# Altium PCB Tranceiver PCB - JLCPCB - 2 Layer - 1oz 1.6mm.PcbDoc
Units mm, origin at the board's own origin, x right, y up, seen from the top; angles counter-clockwise.
Board outline 42 x 52 mm, 2 copper layers (Layer 1, Layer 2), stack 1.62 mm thick; 82 components, 46 nets, 247 pads, 91 vias.
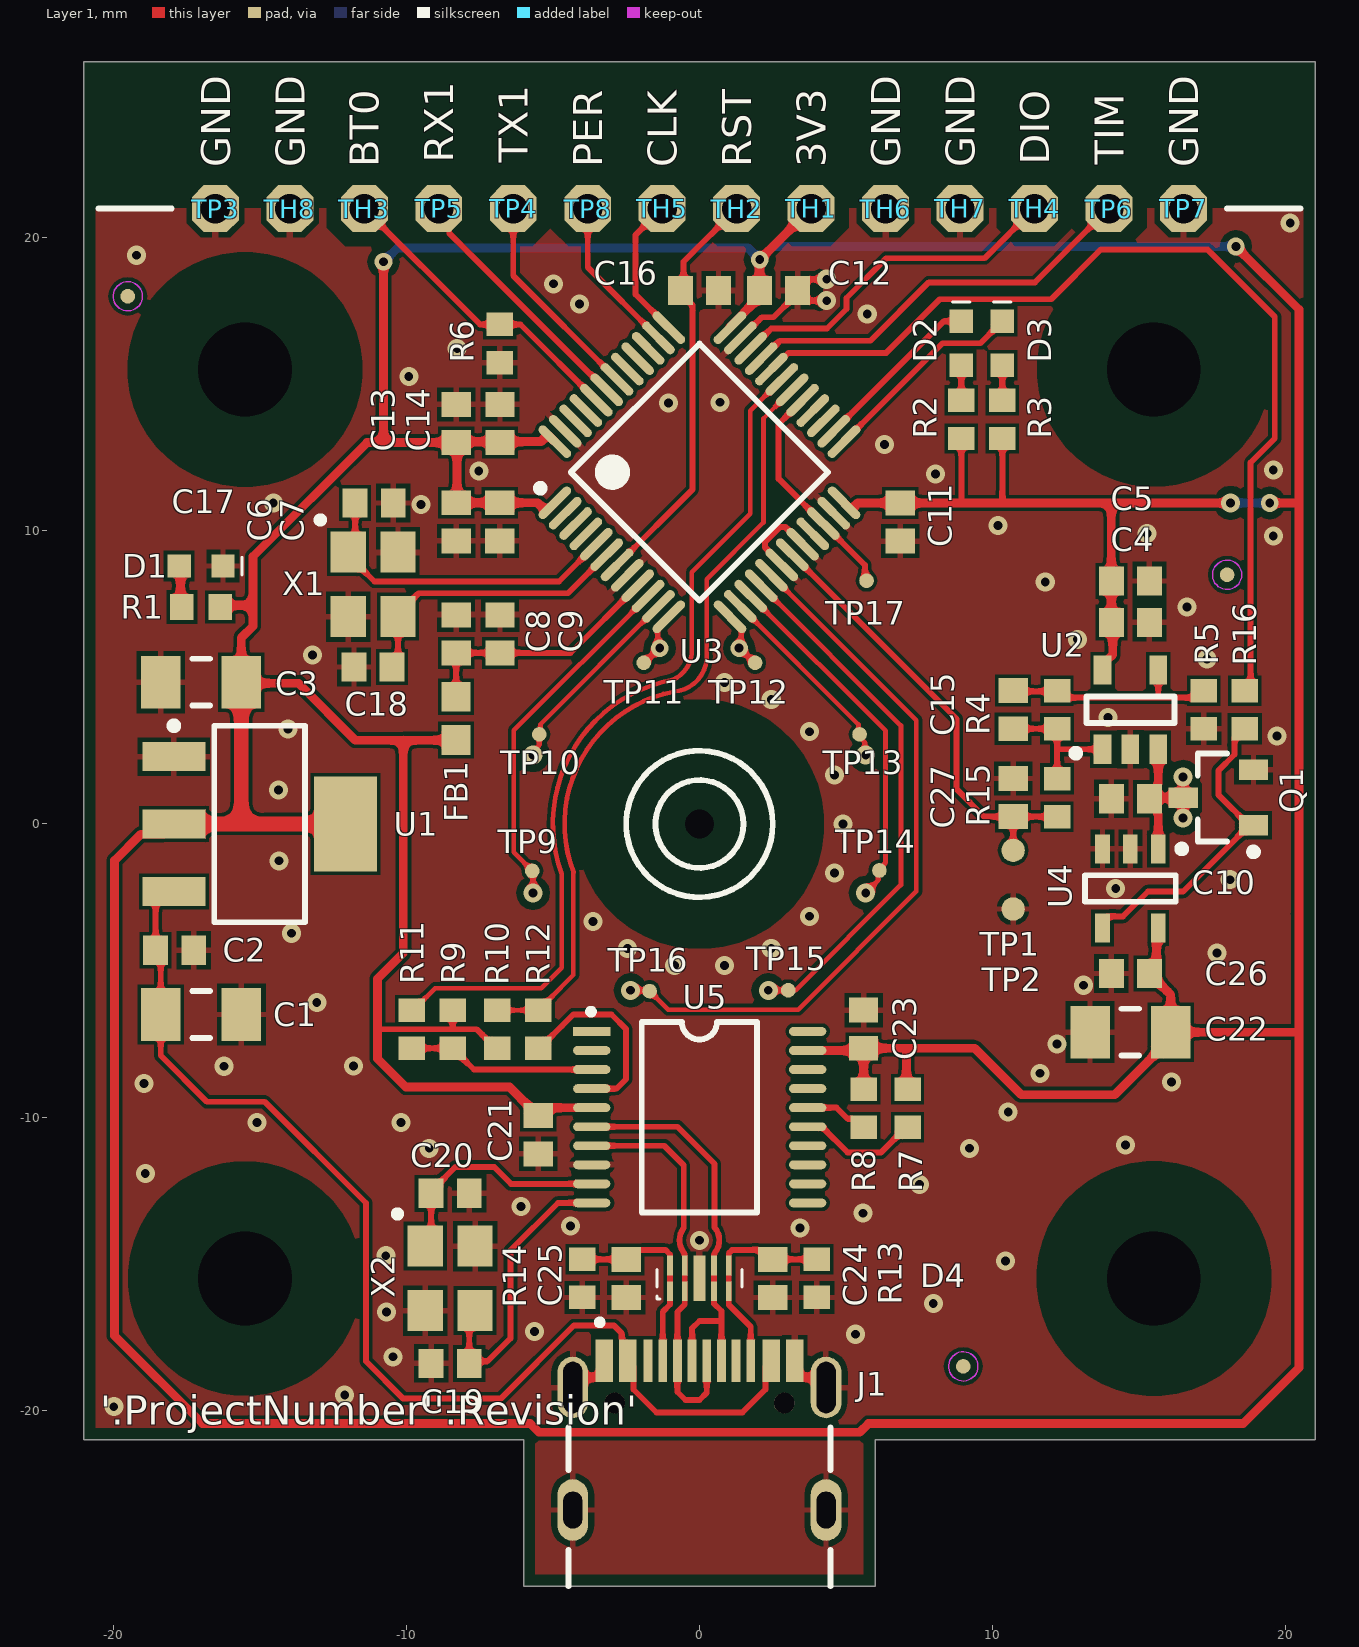
[diagram p0: Layer 1 view]
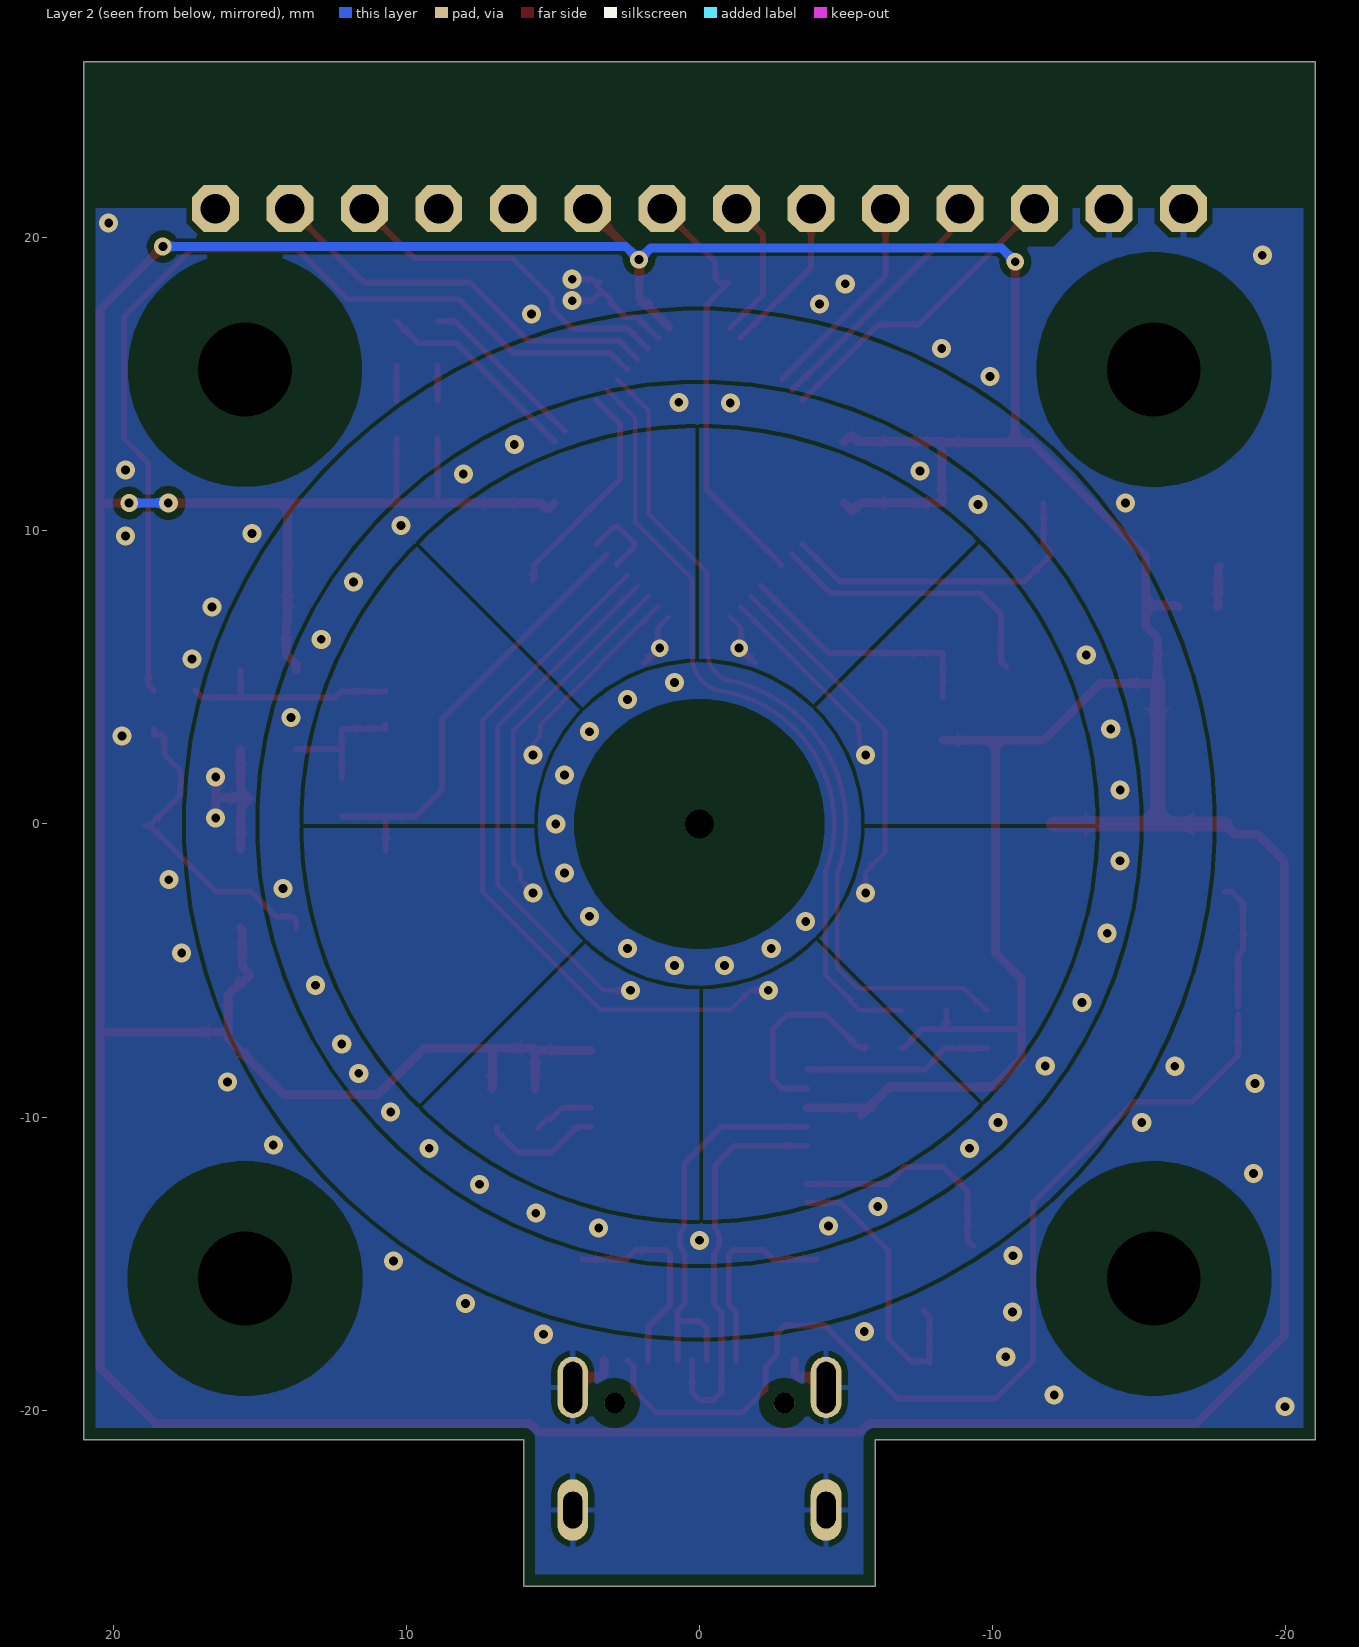
[diagram p1: Layer 2 view, seen from below]
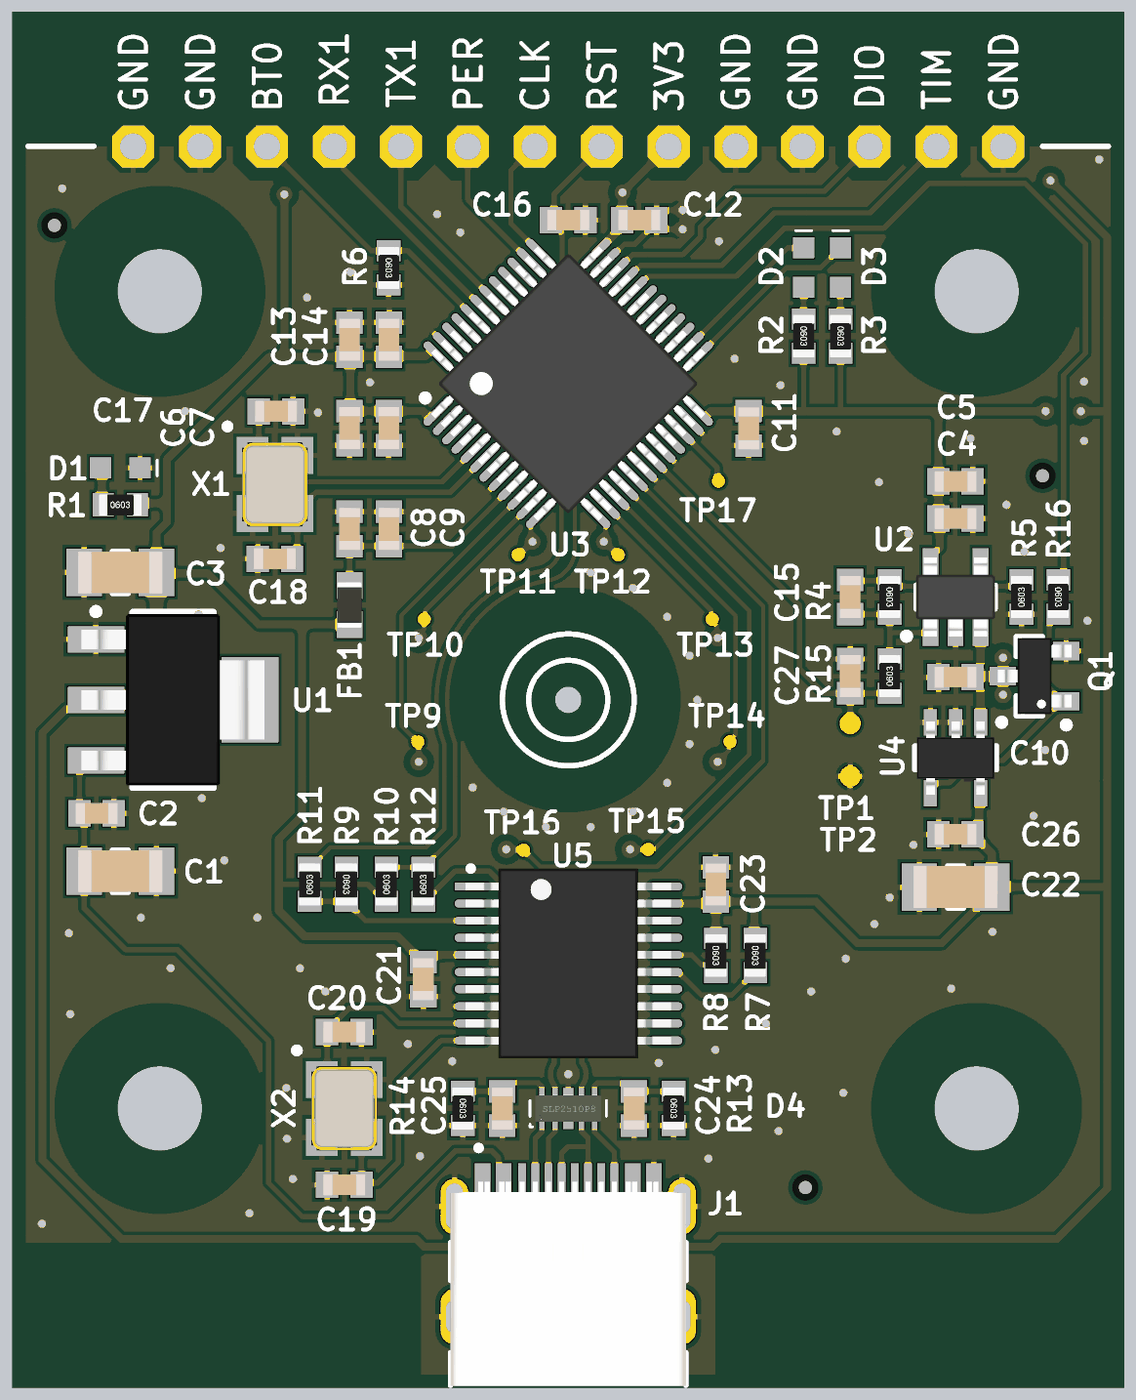
[diagram p2: 3D render of the assembled board from above, using the file's embedded part models]

## Layer stack, top to bottom
Top Solder: solder mask 0.015, Solder Resist, Dk 3.5
Layer 1: signal copper 0.035
Core: core 1.55, IS400, Dk 4.4
Layer 2: signal copper 0.035
Bottom Solder: solder mask 0.015, Solder Resist, Dk 3.5

## Board outline
-21,-21 -21,26 21,26 21,-21 6,-21 6,-26 -6,-26 -6,-21

## Design rules (kind name [scope] priority, off if disabled: settings)
BoardOutlineClearance [All] p1: gap=0.4 ignorepadtopadclearanceinfootprint=FALSE
Clearance [All] p1: gap=0.127 ignorepadtopadclearanceinfootprint=TRUE except(0.2: Arc-Text Track-Text SMDPad-Text Fill-Text Poly-Text Region-Text Text-Text; 0.254: Arc-Via Arc-Hole Track-Via Track-Hole SMDPad-Via SMDPad-Hole Via-Fill Via-Poly Via-Region Fill-Hole Poly-Hole Region-Hole Text-Hole; 0.33: Arc-THPad Track-THPad SMDPad-THPad; 0.5: THPad-THPad THPad-Via THPad-Fill THPad-Poly THPad-Region THPad-Text THPad-Hole Via-Via Via-Text Via-Hole)
ComponentClearance [All] p1: gap=0.2 collisioncheckmode=3 verticalgap=0.2 showdistances=FALSE
Height [All] p1 off: minheight=0 maxheight=25.4 prefheight=12.7
HoleSize "Drill Hole Size" [All] p1: absolutevalues=TRUE maxlimit=6.3 minlimit=0.3 maxpercent=80.000 minpercent=20.000
HoleToHoleClearance [All] p1: gap=0.254 allowstackedmicrovias=FALSE
MinimumAnnularRing [All] p1: minimumring=0.13
MinimumSolderMaskSliver [All] p1 off: minsoldermaskwidth=0.254
PolygonConnect [All] p1: thpad.connectstyle=Relief thpad.reliefconductorwidth=0.2 thpad.reliefentries=4 thpad.polygonreliefangle="90 Angle" thpad.airgapwidth=0.2 smdpad.connectstyle=Relief smdpad.reliefconductorwidth=0.2 smdpad.reliefentries=4 smdpad.polygonreliefangle="90 Angle" smdpad.airgapwidth=0.15 via.connectstyle=Direct via.reliefconductorwidth=0.254 via.reliefentries=4 via.polygonreliefangle="90 Angle" via.airgapwidth=0.254
RoutingVias "Via size" [All] p1: holewidth=0.3 width=0.6 viastyle="Through Hole" minholewidth=0.3 minwidth=0.6 maxholewidth=6.3 maxwidth=10
SilkToSilkClearance [All] p1: silktosilkclearance=0.1
SilkToSolderMaskClearance [IsPad] p1: minsilkscreentomaskgap=0.2 clearancetoexposedcopper=TRUE
SolderMaskExpansion "Via tenting" [IsVia] p1: expansion=0 istentingtop=TRUE
SolderMaskExpansion [All] p2: expansion=0.05 istentingtop=FALSE
UnRoutedNet [All] p1: checkbadconnections=TRUE
Width [All] p1: maxlimit=2 minlimit=0.127 preferedwidth=0.2
22 further rules are at their usual default settings.

## Classes and differential pairs
net class R16_Nets: BIAS NetQ1_1
net class Q1_Nets: GND NetQ1_1 SENSOR
net class TP17_Nets: ADC_TRIG
net class TP16_Nets: SPWM4
net class TP15_Nets: SPWM5
net class TP14_Nets: SPWM6
net class TP13_Nets: SPWM7
net class TP12_Nets: SPWM8
net class TP11_Nets: SPWM1
net class TP10_Nets: SPWM2
net class TP9_Nets: SPWM3
net class X2_Nets: GND NetC19_1 NetC20_1
net class X1_Nets: GND NetC17_1 NetC18_1
net class U5_Nets: +3V3 DN1 DP1 GND NetC19_1 NetC20_1 NetR7_2 NetR8_2 NetR9_2 NetR12_1 NetU5_1 NetU5_2 NetU5_11 NetU5_12 NetU5_13 NetU5_14 NetU5_17 NetU5_18 NetU5_20
net class U4_Nets: +3V3 GND NetQ1_1 SENSOR
net class U3_Nets: +3V3 ADC_TRIG BIAS BOOT0 GND LED1 LED2 NetC8_1 NetC17_1 NetC18_1 NetC27_1 NetTP4_1 NetTP5_1 NetU3_2 NetU3_3 NetU3_4 NetU3_19 NetU3_20 NetU3_21 NetU3_25 NetU3_26 NetU3_39 NetU3_40 NetU3_41 NetU3_45 NetU3_46 NRST PERIOD SPWM1 SPWM2 SPWM3 SPWM4 SPWM5 SPWM6 SPWM7 SPWM8 SWCLK SWDIO TIMEBASE UART1_RX UART1_TX
net class U2_Nets: +3V3 GND NetC15_1 NetC15_2 SENSOR
net class U1_Nets: +3V3 GND VUSB
net class TP8_Nets: PERIOD
net class TP7_Nets: GND
net class TP6_Nets: TIMEBASE
net class TP5_Nets: NetTP5_1
net class TP4_Nets: NetTP4_1
net class TP3_Nets: GND
net class TP2_Nets: GND
net class TP1_Nets: NetC27_1
net class TH8_Nets: GND
net class TH7_Nets: GND
net class TH6_Nets: GND
net class TH5_Nets: SWCLK
net class TH4_Nets: SWDIO
net class TH3_Nets: BOOT0
net class TH2_Nets: NRST
net class TH1_Nets: +3V3
net class R15_Nets: NetC15_2 NetC27_1
net class R14_Nets: CC1 GND
net class R13_Nets: CC2 GND
net class R12_Nets: NetR12_1 UART1_TX
net class R11_Nets: NetR9_2 UART1_RX
net class R10_Nets: +3V3 UART1_TX
net class R9_Nets: +3V3 NetR9_2
net class R8_Nets: +3V3 NetR8_2
net class R7_Nets: +3V3 NetR7_2
net class R6_Nets: BOOT0 GND
net class R5_Nets: GND NetC15_1
net class R4_Nets: NetC15_1 NetC15_2
net class R3_Nets: +3V3 NetD3_1
net class R2_Nets: +3V3 NetD2_1
net class R1_Nets: +3V3 NetD1_1
net class J1_Nets: CC1 CC2 DN1 DP1 GND NetJ1_3 NetJ1_9 VUSB
net class FB1_Nets: +3V3 NetC8_1
net class D4_Nets: CC1 CC2 DN1 DP1 GND
net class D3_Nets: LED2 NetD3_1
net class D2_Nets: LED1 NetD2_1
net class D1_Nets: GND NetD1_1
net class C27_Nets: GND NetC27_1
net class C26_Nets: +3V3 GND
net class C25_Nets: CC1 GND
net class C24_Nets: CC2 GND
net class C23_Nets: +3V3 GND
net class C22_Nets: +3V3 GND
net class C21_Nets: +3V3 GND
net class C20_Nets: GND NetC20_1
net class C19_Nets: GND NetC19_1
net class C18_Nets: GND NetC18_1
net class C17_Nets: GND NetC17_1
net class C16_Nets: GND NRST
net class C15_Nets: NetC15_1 NetC15_2
net class C14_Nets: +3V3 GND
net class C13_Nets: +3V3 GND
net class C12_Nets: +3V3 GND
net class C11_Nets: +3V3 GND
net class C10_Nets: GND SENSOR
net class C9_Nets: GND NetC8_1
net class C8_Nets: GND NetC8_1
net class C7_Nets: +3V3 GND
net class C6_Nets: +3V3 GND
net class C5_Nets: +3V3 GND
net class C4_Nets: +3V3 GND
net class C3_Nets: +3V3 GND
net class C2_Nets: GND VUSB
net class C1_Nets: GND VUSB
component class U_USB2Serial: C19 C20 C21 C22 C23 C24 C25 D4 J1 R7 R8 R9 R10 R11 R12 R13 R14 U5 X2
component class main: C1 C2 C3 C4 C5 C6 C7 C8 C9 C10 C11 C12 C13 C14 C15 C16 C17 C18 C26 C27 D1 D2 D3 FB1 Q1 R1 R2 R3 R4 R5 R6 R15 R16 TH1 TH2 TH3 TH4 TH5 TH6 TH7 TH8 TP1 TP2 TP3 TP4 TP5 TP6 TP7 TP8 TP9 TP10 TP11 TP12 TP13 TP14 TP15 TP16 TP17 U1 U2 U3 U4 X1

## Components (designator, comment, footprint, x,y, rotation, side; value= is the part's Value field where it differs from the comment)
C1 "10uF" "CAP 1206 3216 IPC MEDIUM" -17,-6.5 r0 top
C2 "100nF" "CAP 0603 1608 IPC MEDIUM" -17.898,-4.306 r0 top
C3 "10uF" "CAP 1206 3216 IPC MEDIUM" -17,4.836 r180 top
C4 "100nF" "CAP 0603 1608 IPC MEDIUM" 14.7,6.876 r0 top
C5 "1uF" "CAP 0603 1608 IPC MEDIUM" 14.7,8.29 r0 top
C6 "4.7uF" "CAP 0603 1608 IPC MEDIUM" -8.298,10.307 r270 top
C7 "100nF" "CAP 0603 1608 IPC MEDIUM" -6.812,10.307 r270 top
C8 "1uF" "CAP 0603 1608 IPC MEDIUM" -8.298,6.485 r90 top
C9 "10nF" "CAP 0603 1608 IPC MEDIUM" -6.803,6.485 r90 top
C10 "open" "CAP 0603 1608 IPC MEDIUM" 14.7,0.86 r180 top
C11 "100nF" "CAP 0603 1608 IPC MEDIUM" 6.85,10.3 r270 top
C12 "100nF" "CAP 0603 1608 IPC MEDIUM" 2.7,18.2 r0 top
C13 "4.7uF" "CAP 0603 1608 IPC MEDIUM" -8.298,13.664 r90 top
C14 "100nF" "CAP 0603 1608 IPC MEDIUM" -6.803,13.664 r90 top
C15 "open" "CAP 0603 1608 IPC MEDIUM" 10.7,3.9 r270 top
C16 "100nF" "CAP 0603 1608 IPC MEDIUM" 0,18.2 r0 top
C17 "12pF" "CAP 0603 1608 IPC MEDIUM" -11.092,10.948 r0 top
C18 "12pF" "CAP 0603 1608 IPC MEDIUM" -11.131,5.354 r180 top
C19 "12pF" "CAP 0603 1608 IPC MEDIUM" -8.5,-18.4 r180 top
C20 "12pF" "CAP 0603 1608 IPC MEDIUM" -8.5,-12.6 r0 top
C21 "100nF" "CAP 0603 1608 IPC MEDIUM" -5.5,-10.6 r270 top
C22 "10uF" "CAP 1206 3216 IPC MEDIUM" 14.7,-7.1 r180 top
C23 "100nF" "CAP 0603 1608 IPC MEDIUM" 5.6,-7 r90 top
C24 "330pF" "CAP 0603 1608 IPC MEDIUM" 2.5,-15.5 r270 top
C25 "330pF" "CAP 0603 1608 IPC MEDIUM" -2.5,-15.5 r270 top
C26 "100nF" "CAP 0603 1608 IPC MEDIUM" 14.7,-5.1 r180 top
C27 "47pF" "CAP 0603 1608 IPC MEDIUM" 10.7,0.9 r90 top
D1 "19-217/R6C-AL1M2VY/3T" "19-217 - EVERLIGHT" -17,8.8 r180 top
D2 "19-217/R6C-AL1M2VY/3T" "19-217 - EVERLIGHT" 8.935,16.4 r270 top
D3 "19-217/R6C-AL1M2VY/3T" "19-217 - EVERLIGHT" 10.335,16.4 r270 top
D4 "RCLAMP0524P-N" "RCLAMP0524P-N - BORN" 0,-15.5 r0 top
FB1 "600 E @ 100 MHz" "FB 0603 1608 IPC MEDIUM - Murata" -8.3,3.6 r90 top
J1 "TYPE-C-31-M-12" "TYPE-C-31-M-12 - KOREAN HROPARTS ELEC" 0,-23.4 r0 top
Q1 "2N7002AK" "SOT23-3 IPC MEDIUM - NEXPERIA" 17.7,0.9 r180 top
R1 "1K" "RES 0603 1608 IPC MEDIUM" -17,7.4 r0 top
R2 "1K" "RES 0603 1608 IPC MEDIUM" 8.935,13.8 r270 top
R3 "1K" "RES 0603 1608 IPC MEDIUM" 10.335,13.8 r270 top
R4 "2K" "RES 0603 1608 IPC MEDIUM" 12.2,3.9 r270 top
R5 "1K" "RES 0603 1608 IPC MEDIUM" 17.2,3.9 r90 top
R6 "47K" "RES 0603 1608 IPC MEDIUM" -6.812,16.389 r270 top
R7 "10K" "RES 0603 1608 IPC MEDIUM" 7.1,-9.7 r270 top
R8 "10K" "RES 0603 1608 IPC MEDIUM" 5.6,-9.7 r270 top
R9 "10K" "RES 0603 1608 IPC MEDIUM" -8.418,-7 r270 top
R10 "10K" "RES 0603 1608 IPC MEDIUM" -6.9,-7 r90 top
R11 "100E" "RES 0603 1608 IPC MEDIUM" -9.818,-7 r90 top
R12 "100E" "RES 0603 1608 IPC MEDIUM" -5.5,-7 r90 top
R13 "5.1K" "RES 0603 1608 IPC MEDIUM" 4,-15.5 r270 top
R14 "5.1K" "RES 0603 1608 IPC MEDIUM" -4,-15.5 r270 top
R15 "0E" "RES 0603 1608 IPC MEDIUM" 12.2,0.9 r90 top
R16 "100E" "RES 0603 1608 IPC MEDIUM" 18.6,3.9 r270 top
TH1 "'" "Test Header H1D1.6" 3.81,20.99 r0 top
TH2 "'" "Test Header H1D1.6" 1.27,20.99 r0 top
TH3 "'" "Test Header H1D1.6" -11.43,20.99 r0 top
TH4 "'" "Test Header H1D1.6" 11.43,20.99 r0 top
TH5 "'" "Test Header H1D1.6" -1.27,20.99 r0 top
TH6 "'" "Test Header H1D1.6" 6.35,20.99 r0 top
TH7 "'" "Test Header H1D1.6" 8.89,20.99 r0 top
TH8 "'" "Test Header H1D1.6" -13.97,20.99 r0 top
TP1 "0.8mm" "TEST POINT 0.8MM" 10.7,-0.9 r90 top
TP2 "0.8mm" "TEST POINT 0.8MM" 10.7,-2.9 r90 top
TP3 "'" "Test Header H1D1.6" -16.51,20.99 r90 top
TP4 "'" "Test Header H1D1.6" -6.35,20.99 r90 top
TP5 "'" "Test Header H1D1.6" -8.89,20.99 r90 top
TP6 "'" "Test Header H1D1.6" 13.97,20.99 r90 top
TP7 "'" "Test Header H1D1.6" 16.51,20.99 r90 top
TP8 "'" "Test Header H1D1.6" -3.81,20.99 r90 top
TP9 "0.5mm" "TEST POINT 0.5MM" -5.7,-1.6 r90 top
TP10 "0.5mm" "TEST POINT 0.5MM" -5.462,3.058 r90 top
TP11 "0.5mm" "TEST POINT 0.5MM" -1.9,5.5 r90 top
TP12 "0.5mm" "TEST POINT 0.5MM" 1.9,5.5 r90 top
TP13 "0.5mm" "TEST POINT 0.5MM" 5.462,3.058 r90 top
TP14 "0.5mm" "TEST POINT 0.5MM" 6.139,-1.585 r90 top
TP15 "0.5mm" "TEST POINT 0.5MM" 3.03,-5.673 r90 top
TP16 "0.5mm" "TEST POINT 0.5MM" -1.7,-5.7 r90 top
TP17 "0.5mm" "TEST POINT 0.5MM" 5.7,8.3 r90 top
U1 "AMS1117-3.3" "SOT223 IPC MEDIUM - UMW" -15,0 r0 top
U2 "MCP6001T-I/OT" "SOT23-5 IPC MEDIUM - MICROCHIP" 14.7,3.9 r90 top
U3 "STM32F103C8T6" "LQFP48 IPC MEDIUM - STMICROELECTRONICS" 0,12 r45 top
U4 "74HC1G66GV" "SOT753 IPC MEDIUM - NEXPERIA" 14.7,-2.2 r270 top
U5 "CH340T" "CH340T - WCH" 0,-10 r0 top
X1 "X322512MLB4SI" "X322512MLB4SI - YXC" -11.131,8.172 r270 top
X2 "X322512MLB4SI" "X322512MLB4SI - YXC" -8.5,-15.5 r270 top

## Footprints (in the part's own frame and the unit in brackets; to place one, negate y for a bottom-side part, rotate by r counter-clockwise, add the part's x,y. Pads: shape width x height; smd on the part's side, far side on the other; paste and mask are expansions set on the pad)
"19-217 - EVERLIGHT" [mm]
  rect 0.8x0.8 smd: 1(0.75,0) 2(-0.75,0)
  silkscreen extent -1.4,-0.3 -1.4,0.3, body extent -0.81,-0.4 0.81,0.4, height 0.3
"CAP 0603 1608 IPC MEDIUM" [mm] "Chip Capacitor, 2-Leads, Body 1.60x0.80mm, IPC Medium Density"
  rect 0.85x1 smd: 1(-0.65,0) 2(0.65,0)
  body extent -0.8,-0.4 0.8,0.4, height 0.78
"CAP 1206 3216 IPC MEDIUM" [mm] "Chip Capacitor, 2-Leads, Body 3.20x1.60mm, IPC Medium Density"
  rect 1.35x1.8 smd: 1(-1.375,0) 2(1.375,0)
  silkscreen extent -0.3,-0.8 0.3,0.8, body extent -1.6,-0.8 1.6,0.8, height 0.76
"CH340T - WCH" [mil]
  rect 50x12 smd: 1(-144.61,115.16)
  oval 50x12 smd: 2(-144.61,89.56) 3(-144.61,63.96) 4(-144.61,38.36) 5(-144.61,12.76) 6(-144.61,-12.84) 7(-144.61,-38.34) 8(-144.61,-63.94) 9(-144.61,-89.54) 10(-144.61,-115.14) 11(145.39,-115.14) 12(145.39,-89.54) 13(145.39,-63.94) 14(145.39,-38.34) 15(145.39,-12.84) 16(145.39,12.76) 17(145.39,38.36) 18(145.39,63.96) 19(145.39,89.56) 20(145.39,115.16)
  silkscreen extent -150,-128 77,146, body extent -154,-142 154,142, height 75
"FB 0603 1608 IPC MEDIUM - Murata" [mm] "Chip Inductor, 2-Leads, Body 1.60x0.80mm, IPC Medium Density"
  rect 1.02x0.98 smd: 1(-0.74,0) 2(0.74,0)
  body extent -0.87,-0.47 0.88,0.48, height 0.95
"LQFP48 IPC MEDIUM - STMICROELECTRONICS" [mm] "TSQFP, 48-Leads, Body 7.00x7.00mm, Pitch 0.50mm, IPC Medium Density"
  oval 1.45x0.3 smd: 1(-4.225,2.75) 2(-4.225,2.25) 3(-4.225,1.75) 4(-4.225,1.25) 5(-4.225,0.75) 6(-4.225,0.25) 7(-4.225,-0.25) 8(-4.225,-0.75) 9(-4.225,-1.25) 10(-4.225,-1.75) 11(-4.225,-2.25) 12(-4.225,-2.75) 25(4.225,-2.75) 26(4.225,-2.25) 27(4.225,-1.75) 28(4.225,-1.25) 29(4.225,-0.75) 30(4.225,-0.25) 31(4.225,0.25) 32(4.225,0.75) 33(4.225,1.25) 34(4.225,1.75) 35(4.225,2.25) 36(4.225,2.75)
  oval 0.3x1.45 smd: 13(-2.75,-4.225) 14(-2.25,-4.225) 15(-1.75,-4.225) 16(-1.25,-4.225) 17(-0.75,-4.225) 18(-0.25,-4.225) 19(0.25,-4.225) 20(0.75,-4.225) 21(1.25,-4.225) 22(1.75,-4.225) 23(2.25,-4.225) 24(2.75,-4.225) 37(2.75,4.225) 38(2.25,4.225) 39(1.75,4.225) 40(1.25,4.225) 41(0.75,4.225) 42(0.25,4.225) 43(-0.25,4.225) 44(-0.75,4.225) 45(-1.25,4.225) 46(-1.75,4.225) 47(-2.25,4.225) 48(-2.75,4.225)
  silkscreen extent -4.35,-3.1 3.1,3.57, body extent -4.5,-4.5 4.5,4.5, height 1.6
"RCLAMP0524P-N - BORN" [mm]
  rect 0.2x0.675 smd: 1(-1,-0.437) 2(-0.5,-0.437) 4(0.5,-0.437) 5(1,-0.437) 6(1,0.437) 7(0.5,0.437) 9(-0.5,0.437) 10(-1,0.437)
  rect 0.4x1.55 smd: 3(0,0)
  silkscreen extent -1.45,-0.7 1.45,0.3, body extent -1.25,-0.5 1.25,0.51, height 0.56
"RES 0603 1608 IPC MEDIUM" [mm] "Chip Resistor, 2-Leads, Body 1.60x0.80mm, IPC Medium Density"
  rect 0.8x0.9 smd: 1(-0.65,0) 2(0.65,0)
  body extent -0.8,-0.4 0.8,0.4, height 0.43
"SOT23-3 IPC MEDIUM - NEXPERIA" [mm] "SOT23, 3-Leads, Body 2.90x2.40mm, Pitch 0.95mm, IPC Medium Density"
  rect 1x0.7 smd: 1(-1.2,0.95) 2(-1.2,-0.95) 3(1.2,0)
  silkscreen extent -1.33,-1.5 0.7,1.97, body extent -1.4,-1.45 1.4,1.45, height 1.3
"SOT23-5 IPC MEDIUM - MICROCHIP" [mm] "SOT23, 5-Leads, Body 2.90x2.80mm, Pitch 0.95mm, IPC Medium Density"
  rect 1x0.6 smd: 1(-1.35,0.95) 2(-1.35,0) 3(-1.35,-0.95) 4(1.35,-0.95) 5(1.35,0.95)
  silkscreen extent -1.61,-1.5 0.45,1.99, body extent -1.5,-1.5 1.5,1.5, height 1.45
"SOT223 IPC MEDIUM - UMW" [mm] "SOT223, 4-Leads, Body 6.50x7.00mm (avg), Pitch 2.30mm, IPC Medium Density"
  rect 2.15x1 smd: 1(-2.925,2.3) 2(-2.925,0) 3(-2.925,-2.3)
  rect 2.15x3.25 smd: 4(2.925,0)
  silkscreen extent -3.05,-3.35 1.55,3.47, body extent -3.48,-3.25 3.48,3.25, height 1.69
"SOT753 IPC MEDIUM - NEXPERIA" [mm] "SOT23127P600-8N"
  rect 1x0.5 smd: 1(-1.35,0.95) 2(-1.35,0) 3(-1.35,-0.95) 4(1.35,-0.95) 5(1.35,0.95)
  silkscreen extent -1.47,-1.55 0.45,1.88, body extent -1.39,-1.48 1.4,1.48, height 0.97
"Test Header H1D1.6" [mm] "Hole 1mm, pad 1.6mm"
  oct 1.6x1.6 hole 1 paste-1000 mask+0: 1(0,0)
"TEST POINT 0.5MM" [mm] "TEST POINT 0.5MM"
  round 0.5 smd paste-1: 1(0,0)
"TEST POINT 0.8MM" [mm] "TEST POINT 0.5MM"
  round 0.8 smd paste-1: 1(0,0)
"TYPE-C-31-M-12 - KOREAN HROPARTS ELEC" [mm]
  rect 0.6x1.45 smd: 1(-3.25,5.095) 2(-2.45,5.095) 11(2.45,5.095) 12(3.25,5.095)
  rect 0.3x1.45 smd: 3(-1.75,5.095) 4(-1.25,5.095) 5(-0.75,5.095) 6(-0.25,5.095) 7(0.25,5.095) 8(0.75,5.095) 9(1.25,5.095) 10(1.75,5.095)
  oval 1.05x2.1 hole 0.65 slot 1.25 at 90 deg: 13(-4.32,0) 13(4.32,0)
  oval 1.05x2.1 hole 0.65 slot 1.75 at 90 deg: 13(-4.32,4.18) 13(4.32,4.18)
  round 0.7 hole 0.7 unplated: ""(-2.89,3.65) ""(2.89,3.65)
  silkscreen extent -4.47,-2.6 4.47,6.5, body extent -4.47,-2.62 4.47,5.12, height 3.27
"X322512MLB4SI - YXC" [mm]
  rect 1.4x1.2 smd mask+0: 1(-1.1,-0.85) 2(1.1,-0.85) 3(1.1,0.85) 4(-1.1,0.85)
  silkscreen extent -2.3,-1.9 -2.1,-1.7, body extent -1.6,-1.25 1.6,1.25, height 0.6

## Part data
C1 C3 C22: library part 86, "10uF ±10% 25V X5R 1206 Multilayer Ceramic Capacitors MLCC - SMD/SMT RoHS", Case Technology=SMT, Dielectric=X5R, Manufacturer=SAMSUNG, Max Temperature=85°C, Part Number=CL31A106KAHNNNE, Supplier Part Number 1=C9807, Tolerance=10%, Voltage=25V, Capacitance=10uF, ComponentLink1Description="Octopart Search", ComponentLink1URL=https://octopart.com/search?q=CL31A106KAHNNNE&currency=USD&specs=0, DB_ID=86, Supplier 1=LCSC, Supplier 2=Farnell, Supplier 3=Mouser, Supplier Part Number 2=3013511, Supplier Part Number 3=187-CL31A106KAHNNNE
C2 C4 C7 C11 C12 C14 C16 C21 C23 C26: library part 62, "100nF ±10% 50V X7R 0603 Multilayer Ceramic Capacitors MLCC - SMD/SMT RoHS", Case Technology=SMT, Dielectric=X7R, Manufacturer=TORCH, Max Temperature=125°C, Part Number=C0603B104K500NT, Supplier Part Number 1=C478888, Tolerance=20%, Voltage=50V, Capacitance=100nF, ComponentLink1Description="Octopart Search", ComponentLink1URL=http://octopart.com/search?q=C0603C104M4RACTU%20KEMET, DB_ID=62, Supplier 1=LCSC
C5 C8: library part 74, "Generic 0603 1608 Capacitor", Case Technology=SMT, Dielectric=X7R, Manufacturer=TDK, Max Temperature=125°C, Part Number=CGA3E1X7R1C105M080AC, Supplier Part Number 1=2768390, Tolerance=20%, Voltage=16V, Capacitance=1uF, ComponentLink1Description="Octopart Search", ComponentLink1URL=http://octopart.com/search?q=CGA3E1X7R1C105M080AC%20TDK, DB_ID=74, Supplier 1=Farnell
C6 C13: library part 82, "4.7 µF, 25 V, 0603 [1608 Metric], ± 10%, X5R, GRM Series", Case Technology=SMT, Dielectric=X5R, Manufacturer=MURATA, Max Temperature=85°C, Part Number=GRM188R61E475KE11D, Supplier Part Number 1=2426959, Tolerance=10%, Voltage=25V, Capacitance=4.7uF, ComponentLink1Description="Octopart Search", ComponentLink1URL=http://octopart.com/search?q=GRM188R61E475KE11D%20MURATA, DB_ID=82, Supplier 1=Farnell
C9: library part 50, "Generic 0603 1608 Capacitor", Case Technology=SMT, Dielectric=C0G/NP0, Max Temperature=125°C, Part Number=x, Supplier Part Number 1=2495178, Tolerance=10%, Voltage=50V, Capacitance=10nF, DB_ID=50, Supplier 1=Farnell
C10 C15: library part 1, "Capacitor 0603 1608 value undefined", Case Technology=SMT, Dielectric=C0G/NP0, Max Temperature=125°C, Part Number=x, Tolerance=10%, Voltage=50V, Capacitance=open, DB_ID=1
C17 C18 C19 C20: library part 15, "12pF ±5% 50V NP0 0603 Multilayer Ceramic Capacitors MLCC - SMD/SMT RoHS", Case Technology=SMT, Dielectric=C0G/NP0, Manufacturer=YAGEO, Max Temperature=125°C, Part Number=CC0603JRNPO9BN120, Supplier Part Number 1=C107034, Tolerance=5%, Voltage=50V, Capacitance=12pF, ComponentLink1Description="Octopart Search", ComponentLink1URL=https://octopart.com/cc0603jrnpo9bn120-yageo-9289271?r=sp, DB_ID=15, Supplier 1=LCSC, Supplier 2=Farnell, Supplier 3=Mouser, Supplier Part Number 2=721979, Supplier Part Number 3=603-CC603JRNPO9BN120
C24 C25: library part 32, "Generic 0603 1608 Capacitor", Case Technology=SMT, Dielectric=C0G/NP0, Manufacturer=SAMSUNG, Max Temperature=125°C, Part Number=CL10C331JB8NNNC, Supplier Part Number 1=C1664, Tolerance=5%, Voltage=50V, Capacitance=330pF, ComponentLink1Description=Octopart, ComponentLink1URL=https://octopart.com/cl10c331jb8nnnc-samsung-9287376?r=sp, DB_ID=32, Supplier 1=LCSC, Supplier 2=Mouser, Supplier 3=Digikey, Supplier Part Number 2=187-CL10C331JB8NNNC, Supplier Part Number 3=1276-1073-1-ND
C27: library part 22, "Generic 0603 1608 Capacitor", Case Technology=SMT, Dielectric=C0G/NP0, Max Temperature=125°C, Part Number=x, Tolerance=10%, Voltage=50V, Capacitance=47pF, DB_ID=22
D1 D2 D3: library part 11, "Red 617.5~633.5nm 0603 Light Emitting Diodes (LED) RoHS", Case Technology=SMT, Colour=Red, Manufacturer=EVERLIGHT, Supplier Part Number 1=C72044, ComponentLink1Description="Octopart Search", ComponentLink1URL=http://octopart.com/search?q=19-217/R6C-AL1M2VY/3T%20EVERLIGHT, ComponentLink2Description=Datasheet, ComponentLink2URL="C:\Users\Admin\stack\Altium\Database_2.0\Datasheets\19-217 R6C-AL1M2VY 3T - Datasheet - EVERLIGHT.pdf", ComponentLink3Description="Product page", ComponentLink3URL=https://www.everlight.com/SeriationProduct.aspx?Seq=ab6bdd5e-2405-e411-8b3b-0002a54e500f, DB_ID=11, If="5 mA", Part Number=19-217/R6C-AL1M2VY/3T, Supplier 1=LCSC, Vf="2.2 V", Wavelenght="632 nm"
D4: library part 5, "TVS ARRAY, 40W, 5V, UNIDIRECTIONAL, USB, HDMI", Case Technology=SMT, Manufacturer=BORN, Supplier Part Number 1=C316044, Working Voltage="5 V", ComponentLink1Description="Octopart Search", ComponentLink1URL=https://octopart.com/search?q=RCLAMP0524P-N+BORN&currency=USD&specs=0, ComponentLink2Description=Datasheet, ComponentLink2URL="C:\Users\Admin\stack\Altium\Database_2.0\Datasheets\RCLAMP0524P-N - Datasheet - BORN.pdf", ComponentLink3Description="Product page", ComponentLink3URL=http://www.born-tw.com/, DB_ID=5, P_PK="40 W", Part Number=RCLAMP0524P-N, Polarity=Unidirectional, Supplier 1=LCSC, V_BR (max)="7.8 V", V_BR (Min)="5.5 V"
FB1: library part 1, "Ferrite Bead, 0603 [1608 Metric], 600 ohm, 500 mA, BLM18A Series, 0.38 ohm, ± 25%", Case Technology=SMT, Current rating="500 mA", DC Resistance="0.38 E", Manufacturer=MURATA, Part Number=BLM18AG601SN1D, Supplier Part Number 1=1515679, ComponentLink1Description="Octopart Search", ComponentLink1URL=http://octopart.com/search?q=BLM18AG601SN1D%20MURATA, ComponentLink2Description=Datasheet, ComponentLink2Filename="BLM18KG121TN1D - Datasheet - MURATA", ComponentLink2URL="C:\Users\Admin\stack\Altium\Database_2.0\Datasheets\BLM18KG121TN1D - Datasheet - MURATA.pdf", DB_ID=1, Impedance @ Frequency="600 E @ 100 MHz", Supplier 1=Farnell, Supplier 2=Mouser, Supplier 3=LCSC, Supplier Part Number 2=81-BLM11A601S, Supplier Part Number 3=C19330
J1: library part 54, "USB - Type C Female 12-pin", Case Technology=SMT, Manufacturer="HRO ELECTRONICS", Supplier Part Number 1=C165948, ComponentLink1Description="Octopart Search", ComponentLink1URL=https://octopart.com/type-c-31-m-12-hro+electronics-99357592?r=sp, ComponentLink2Description=Datasheet, ComponentLink2URL="C:\Users\Admin\stack\Altium\Database_2.0\Datasheets\TYPE-C-31-M-12 - Drawing - KOREAN HROPARTS ELEC.pdf", ComponentLink3Description="Product page", ComponentLink3URL=http://www.krhro.com/USBjack/20180124/764.html, DB_ID=54, Orientation=Horizontal, Part Number=TYPE-C-31-M-12, Pin count=12, Pitch=-, Row count=1, Subcategory=Wire-To-Board, Supplier 1=LCSC
Q1: library part 7, "Power MOSFET, N Channel, 60 V, 190 mA, 3 ohm, SOT-23 TO-236AB", Case Technology=SMT, Manufacturer=NEXPERIA, Supplier Part Number 1=2191746, ComponentLink1Description="Octopart Search", ComponentLink1URL=https://octopart.com/nx7002ak%2C215-nexperia-78740588?r=sp#PriceAndStock, ComponentLink2Description=Datasheet, ComponentLink2URL="C:\Users\Admin\stack\Altium\Database_2.0\Datasheets\NX7002AK - Datasheet - NEXPERIA.pdf", ComponentLink3Description="Product page", ComponentLink3URL=https://www.nexperia.com/products/mosfets/small-signal-mosfets/NX7002AK.html, DB_ID=7, FET Type=N-Channel, Id="190 mA", Part Number=2N7002AK, Pd="265 mW", Rds(on)="3 E", Subcategory=Single, Supplier 1=Farnell, Supplier 2=Mouser, Supplier 3=LCSC, Supplier Part Number 2=771-NX7002AK,215, Supplier Part Number 3=C255584, Vds="60 V", Vgs(th)="2.1 V"
R1 R2 R3 R5: library part 75, "1kΩ ±1% 0.1W ±100ppm/℃ 0603 Chip Resistor - Surface Mount RoHS", Case Technology=SMT, Manufacturer=YAGEO, Part Number=RC0603FR-071KL, Power=100mW, Supplier Part Number 1=C22548, Tolerance=1%, Voltage=75V, ComponentLink1Description="Octopart Search", ComponentLink1URL=https://octopart.com/rc0603fr-071kl-yageo-55402882?r=sp, DB_ID=75, Resistance=1K, Subcategory="Resistor E24 Range", Supplier 1=LCSC, Supplier 2=Farnell, Supplier 3=Mouser, Supplier Part Number 2=2421849, Supplier Part Number 3=603-RC0603FR-071KL
R4: library part 82, "2kΩ ±1% 0.1W 0603 Chip Resistor - Surface Mount RoHS", Case Technology=SMT, Manufacturer=TOYOHM, Part Number=RMC06032K1%N, Power=100mW, Supplier Part Number 1=C269421, Tolerance=1%, Voltage=50V, DB_ID=82, Resistance=2K, Subcategory="Resistor E24 Range", Supplier 1=LCSC
R6: library part 115, "47kΩ ±1% 100mW ±100ppm/℃ Thick Film Resistors 75V -55℃~+155℃ 0603 Chip Resistor - Surface Mount RoHS", Case Technology=SMT, Manufacturer=YAGEO, Part Number=RC0603FR-0747KL, Power=100mW, Supplier Part Number 1=C105579, Tolerance=1%, Voltage=75V, ComponentLink1Description="Octopart Search", ComponentLink1URL=https://octopart.com/rc0603fr-0747kl-yageo-1369017?r=sp, DB_ID=115, Resistance=47K, Subcategory="Resistor E24 Range", Supplier 1=LCSC, Supplier 2=Farnell, Supplier 3=Mouser, Supplier Part Number 2=2421877, Supplier Part Number 3=603-RC0603FR-0747KL
R7 R8 R9 R10: library part 99, "10kΩ ±1% 0.1W ±100ppm/℃ 0603 Chip Resistor - Surface Mount RoHS", Case Technology=SMT, Manufacturer=YAGEO, Part Number=RC0603FR-0710KL, Power=100mW, Supplier Part Number 1=C98220, Tolerance=1%, Voltage=75V, ComponentLink1Description="Octopart Search", ComponentLink1URL=https://octopart.com/rc0603fr-0710kl-yageo-40025538?r=sp, DB_ID=99, Resistance=10K, Subcategory="Resistor E24 Range", Supplier 1=LCSC, Supplier 2=Farnell, Supplier 3=Digikey, Supplier Part Number 2=2421850, Supplier Part Number 3=311-10.0KHRCT-ND
R11 R12 R16: library part 51, "100Ω ±1.0% 1/10W ±100ppm/℃ Thick Film Resistors 75V -55℃~+155℃ 0603 Chip Resistor - Surface Mount RoHS", Case Technology=SMT, Manufacturer=YAGEO, Part Number=RC0603FR-07100RL, Power=100mW, Supplier Part Number 1=C105588, Tolerance=1%, Voltage=75V, ComponentLink1Description="Octopart Search", ComponentLink1URL=https://octopart.com/rc0603fr-07100rl-yageo-55402879?r=sp#PriceAndStock, DB_ID=51, Resistance=100E, Subcategory="Resistor E24 Range", Supplier 1=LCSC, Supplier 2=Farnell, Supplier 3=Mouser, Supplier Part Number 2=2421848, Supplier Part Number 3=603-RC0603FR-07100RL
R13 R14: library part 92, "5.1kΩ ±1% 0.1W 0603 Chip Resistor - Surface Mount RoHS", Case Technology=SMT, Manufacturer=TYOHM, Part Number=RMC06035.1K1%N, Power=100mW, Supplier Part Number 1=C269716, Tolerance=1%, Voltage=50V, DB_ID=92, Resistance=5.1K, Subcategory="Resistor E24 Range", Supplier 1=LCSC
R15: library part 2, "0Ω ±1.0% 1/10W Thick Film Resistors 75V -55℃~+155℃ 0603 Chip Resistor - Surface Mount RoHS", Case Technology=SMT, Manufacturer=YAGEO, Part Number=RC0603FR-070RL, Power=100mW, Supplier Part Number 1=C100044, Tolerance=1%, Voltage=75V, ComponentLink1Description="Octopart Search", ComponentLink1URL=https://octopart.com/rc0603fr-070rl-yageo-1180803?r=sp#PriceAndStock, DB_ID=2, Resistance=0E, Subcategory="Resistor E24 Range", Supplier 1=LCSC, Supplier 2=Farnell, Supplier 3=Mouser, Supplier Part Number 2=2309106, Supplier Part Number 3=603-RC0603FR-070RL
TH1 TH2 TH3 TH4 TH5 TH6 TH7 TH8 TP3 TP4 TP5 TP6 TP7 TP8: library part 4, "Octagonal THT H1D1.6mm test header", Case Technology=THT, DB_ID=4, Size=1.6mm
TP1 TP2: library part 5, "Round 0.8mm testpoint", Case Technology=SMT, DB_ID=5, Size=0.8mm
TP9 TP10 TP11 TP12 TP13 TP14 TP15 TP16 TP17: library part 2, "Round 0.5mm testpoint", Case Technology=SMT, DB_ID=2, Size=0.5mm
U1: library part 24, "LDO 3.3V 1A 18V", Case Technology=SMT, Manufacturer=UMW, Supplier Part Number 1=C347222, ComponentLink1Description="Octopart Search", ComponentLink1URL=https://octopart.com/ams1117-3.3-umw%28youtai+semiconductor+co.%2C+ltd.%29-121753726?r=sp, ComponentLink2Description=Datasheet, ComponentLink2URL="C:\Users\Admin\stack\Altium\Database_2.0\Datasheets\AMS1117-3.3 - Datasheet - UMW.pdf", ComponentLink3Description="Product page", ComponentLink3URL=http://www.umw-ic.com/en/product_details/UMW+AMS1117-3.3, DB_ID=24, Iout="1 A", Part Number=AMS1117-3.3, Subcategory="LDO Voltage Regulators", Supplier 1=LCSC, V dropout="1.3 V @ 1 A", Vin Max="18 V", Vin Min="0 V", Vout="3.3 V"
U2: library part 21, "Operational Amplifier, Single, 1 Amplifier, 1 MHz, 0.6 V/µs, 1.8V to 6V, SOT-23, 5 Pins", Case Technology=SMT, Manufacturer=MICROCHIP, Supplier Part Number 1=4974992, ComponentLink1Description="Octopart Search", ComponentLink1URL=http://octopart.com/search?q=MCP6001T-I/OT%20MICROCHIP, ComponentLink2Description=Datasheet, ComponentLink2URL="C:\Users\Admin\stack\Altium\Database_2.0\Datasheets\MCP6001T-I OT - Datasheet - MICROCHIP.pdf", ComponentLink3Description="Product page", ComponentLink3URL=https://www.microchip.com/wwwproducts/en/MCP6001, DB_ID=21, Part Number=MCP6001T-I/OT, Subcategory="Op Amps", Supplier 1=Farnell, Supplier 2=LCSC, Supplier 3=-, Supplier Part Number 2=C116490, Vin Max="6 V", Vin Min="1.8 V", Vin typ=-
U3: library part 20, "ARM Microcontroller, Motor Control, STM32 Family STM32F1 Series Microcontrollers, ARM Cortex-M3", Case Technology=SMT, Manufacturer=STMICROELECTRONICS, Supplier Part Number 1=1447637, ComponentLink1Description="Octopart Search", ComponentLink1URL=http://octopart.com/search?q=STM32F103C8T6%20STMICROELECTRONICS, ComponentLink2Description=Datasheet, ComponentLink2URL="C:\Users\Admin\stack\Altium\Database_2.0\Datasheets\STM32F103C8T6 - Datasheet - STMICROELECTRONICS.pdf", ComponentLink3Description="Product page", ComponentLink3URL=http://www.st.com/en/microcontrollers/stm32f103c8.html, DB_ID=20, Part Number=STM32F103C8T6, Subcategory=Microcontrollers, Supplier 1=Farnell, Supplier 2=Mouser, Supplier 3=LCSC, Supplier Part Number 2=511-STM32F103C8T6, Supplier Part Number 3=C8734, Vin Max="3.6 V", Vin Min="2 V", Vin typ=-
U4: library part 77, "Analogue Switch, SPST, 1 Channels, 50 ohm, 2V to 9V, TSOP, 5 Pins", Case Technology=SMT, Manufacturer=NEXPERIA, ComponentLink1Description="Octopart Search", ComponentLink1URL=https://octopart.com/74hc1g66gv%2C125-nexperia-78737123?r=sp, ComponentLink2Description=Datasheet, ComponentLink2URL="C:\Users\Admin\stack\Altium\Database_2.0\Datasheets\74HC1G66GV - Datasheet - NEXPERIA.pdf", ComponentLink3Description="Product Page", ComponentLink3URL=https://www.nexperia.com/products/analog-logic-ics/i-o-expansion-logic/analog-switches/74AHC1G66GV.html, DB_ID=77, Part Number=74HC1G66GV, Subcategory="Analogue Switches", Supplier 1=LCSC, Supplier 2=Farnell, Supplier 3=Mouser, Supplier Part Number 1=74HC1G66GV, Supplier Part Number 2=2777726, Supplier Part Number 3=771-HC1G66GV125, Vin Max="9.0 V", Vin Min="2.0 V", Vin typ=-
U5: library part 76, "USB to UART Bridge Controller USB 2.0 Full speed 50bps to 2Mbps", Case Technology=SMT, Manufacturer=WCH, Supplier Part Number 1=C8689, ComponentLink1Description=Octopart, ComponentLink1URL=https://octopart.com/search?q=CH340T&currency=USD&specs=0, ComponentLink2Description=Datasheet, ComponentLink2URL="C:\Users\Admin\stack\Altium\Database_2.0\Datasheets\CH340T - Datasheet - WCH.pdf", ComponentLink3Description="Product Page", ComponentLink3URL=http://www.wch-ic.com/products/CH340.html, DB_ID=76, Part Number=CH340T, Subcategory="Drivers & Interfaces", Supplier 1=LCSC, Vin Max="5.3 V", Vin Min="3.3 V", Vin typ=-
X1 X2: library part 6, "12MHz ±10ppm 9pF 80Ω SMD-3225_4P Crystals RoHS", Case Technology=SMT, Frequency=12MHz, Frequency Tolerance=10ppm, Load Capacitance=9pF, Manufacturer=YXC, Max Temperature=85°C, Min Temperature=-40°C, Supplier Part Number 1=C112971, ComponentLink1Description="Octopart Search", ComponentLink1URL=https://octopart.com/x322512mlb4si-yxc-99368244?r=sp, ComponentLink2Description=Datasheet, ComponentLink2URL="C:\Users\Admin\stack\Altium\Database_2.0\Datasheets\X322512MLB4SI - Datasheet - YXC.pdf", ComponentLink3Description="Product page", ComponentLink3URL=http://www.yxc.hk/3225smdjingzhen/YSX321SL.html, DB_ID=6, Part Number=X322512MLB4SI, Supplier 1=LCSC

## Free pads (board coordinates)
  round 0.5 smd mask+0.25: FD1(18,8.5) FD2(9,-18.5) FD3(-19.5,18)
  round 0 hole 3.2 unplated: ""(-15.5,-15.5) ""(-15.5,15.5) ""(15.5,-15.5) ""(15.5,15.5)
  round 0 hole 1 unplated: ""(0,0)

## Via types
v1: diameter 0.65, hole 0.3, Layer 1 to Layer 2, tented both sides, 85 vias
v2: diameter 0.6, hole 0.3, Layer 1 to Layer 2, tented both sides, 6 vias

## Nets (pads, with @x,y where several pads share a name; then routed paths per layer and width w, separated by ;. In a path a pad name is that pad's centre, name@x,y a point inside that pad or via, vN(x,y) a via of type N, cw(c..) or ccw(c..) an arc to the next point about the centre after c; other vN are vias at no path point)
+3V3: C3.1 C4.1 C5.1 C6.1 C7.1 C11.1 C12.1 C13.1 C14.1 C21.1 C22.1 C23.1 C26.1 FB1.1 R1.2 R2.2 R3.2 R7.1 R8.1 R9.1 R10.1 TH1.1 U1.2 U1.4 U2.5 U3.1 U3.24 U3.36 U3.48 U4.5 U5.5 U5.19 | length 259.1
  Layer 1 w0.2: -10.981,-6.968 -10.95,-6.999 -8.418,-6.999 R9.1 ; -8.417,-7 -7.6,-7 -6.95,-7.65 R10.1 ; R2.2 8.935,10.953 8.938,10.95 ; 10.335,10.95 R3.2
  Layer 1 w0.3: U1.2 -18.275,-0.35 -19.05,-0.35 -19.95,-1.25 -19.95,-17.45 -16.95,-20.45 -5.772,-20.45 -5.472,-20.75 5.472,-20.75 5.772,-20.45 18.55,-20.45 20.45,-18.55 20.45,-7.7 ; R1.2 -16.293,7.457 -15.225,7.457 ; v2(-10.775,19.175) -10.775,13.014 ; FB1.1 -10.1,2.86 ; C21.1 -6.475,-8.975 -10.007,-8.975 -10.981,-8.001 -10.981,-6.968 -10.981,-5.281 -10.1,-4.4 -10.1,2.86 ; C21.1@-5.5,-9.676 U5.5 ; U3.1 -5.223,10.666 -5.514,10.957 C7.1 C6.1 -8.298,11.158 -8.268,11.187 -8.268,12.985 C13.1 ; U3.48 -5.135,13.246 -5.2,13.246 -5.403,13.043 -8.268,13.043 C13.1 ; U3.36 1.043,16.959 C12.1@2.05,17.966 ; C12.1 v2@2.05,19.24 ; v2(2.06,19.25) TH1.1@3.81,21 ; U5.19 3.694,-7.724 5.526,-7.724 C23.1 ; U3.24 5.142,10.747 5.207,10.747 5.41,10.95 C11.1 8.938,10.95 10.335,10.95 14.05,10.95 ; R8.1 C23.1 ; R7.1 7.061,-9.011 7.061,-7.667 7.079,-7.65 ; U2.5 13.75,5.45 13.9,5.6 13.92,5.6 14.096,5.776 C4.1@14.096,6.847 ; C4.1 C5.1 14.05,10.95 ; U4.5 15.592,-3.608 15.592,-4.858 C26.1 15.35,-5.175 15.625,-5.45 15.7,-5.45 16.075,-5.825 C22.1 ; v1(18.116,10.95) 14.05,10.95 ; v2(18.3,19.7) 20.45,17.55 20.45,10.946 ; v2(19.454,10.95) 20.446,10.95 20.45,10.946 ; 20.443,-3.06 20.45,-3.067 ; 20.448,-7.699 20.45,-7.7 ; -15.225,7.457 -15.225,9.125 -11.336,13.014 -10.775,13.014 ; -15.225,7.457 -15.225,6.75 -15.625,6.35 C3.1 -15.589,4.8 -13.675,4.8 -11.735,2.86 -10.1,2.86 ; -10.775,13.014 C13.1 ; C23.1 7.079,-7.65 ; 7.079,-7.65 9.392,-7.65 10.975,-9.234 14.166,-9.234 16.075,-7.325 C22.1 ; C22.1 20.445,-7.1 20.45,-7.095 ; 20.45,-7.7 20.45,-7.095 ; 20.45,-7.095 20.45,-3.067 ; 20.45,-3.067 20.45,10.946
  Layer 1 w0.5: U1.2 -15.625,0 ; C3.1 -15.625,0 ; U1.4 -15.625,0
  Layer 2 w0.3: v2(-10.775,19.175) -10.3,19.65 1.66,19.65 v2(2.06,19.25) ; v2@2.1,19.25 2.1,19.29 2.51,19.7 v2(18.3,19.7) ; v1(18.116,10.95) v2(19.454,10.95)
ADC_TRIG: TP17.1 U3.22 U3.29 | length 7.8
  Layer 1 w0.2: U3.29 2.703,13.642 2.703,11.772 U3.22@4.2,10.275 ; TP17.1 5.643,8.357 5.643,8.832 U3.22 ; U3.22@4.2,10.275 U3.22 ; U3.22@4.2,10.275 4.2,10.3 4.225,10.275 U3.22
BIAS: R16.1 U3.32 | length 33
  Layer 1 w0.2: U3.32 2.484,15.518 3.037,16.071 6.371,16.071 8.2,17.9 12,17.9 13.7,19.6 17.325,19.6 19.625,17.3 19.625,13.15 18.8,12.325 18.8,4.75 R16.1
BOOT0: R6.1 TH3.1 U3.44 | length 10.6
  Layer 1 w0.2: TH3.1 -7.479,17.039 -6.1,17.039 U3.44
CC1: C25.1 D4.1 D4.10 J1.4 R14.1 | length 6.9
  Layer 1 w0.2: R14.1 C25.1 -2.175,-14.525 -1.983,-14.525 ; -1.983,-14.525 -1.158,-14.525 -1,-14.683 D4.1 -1,-16.39 -1.25,-16.64 J1.4
CC2: C24.1 D4.5 D4.6 J1.10 R13.1 | length 7.2
  Layer 1 w0.2: J1.10 1.75,-17.15 1,-16.4 D4.6 1,-14.645 1.117,-14.527 2.177,-14.527 C24.1 R13.1
DN1: D4.2 D4.9 J1.5 J1.7 U5.7 | length 13.6
  Layer 1 w0.2: U5.7 -1.201,-10.974 -0.536,-11.639 -0.536,-13.784 ccw(c0,-14.2) -0.54,-14.611 cw(c-0.7,-14.732) -0.5,-14.731 D4.9 D4.2 -0.5,-16.39 -0.75,-16.64 J1.5 -0.75,-19.375 -0.475,-19.65 0,-19.65 0.25,-19.4 J1.7
DP1: D4.4 D4.7 J1.6 J1.8 U5.6 | length 13.8
  Layer 1 w0.2: U5.6 -0.749,-10.326 0.517,-11.592 0.517,-13.76 cw(c0,-14.2) 0.538,-14.614 ccw(c0.698,-14.735) 0.498,-14.75 cw(c-0.097,-14.797) 0.5,-14.797 D4.7 D4.4 0.5,-16.365 0.75,-16.615 0.75,-16.945 ; J1.6 -0.25,-17.2 0,-16.95 0.745,-16.95 0.75,-16.945 ; J1.8 0.75,-16.945
GND: C1.2 C2.2 C3.2 C4.2 C5.2 C6.2 C7.2 C8.2 C9.2 C10.2 C11.2 C12.2 C13.2 C14.2 C16.2 C17.2 C18.2 C19.2 C20.2 C21.2 C22.2 C23.2 C24.2 C25.2 C26.2 C27.2 D1.2 D4.3 J1.1 J1.12 J1.13 Q1.2 R5.1 R6.2 R13.2 R14.2 TH6.1 TH7.1 TH8.1 TP2.1 TP3.1 TP7.1 U1.1 U2.2 U3.8 U3.18 U3.20 U3.23 U3.35 U3.47 U4.2 U4.3 U5.8 X1.2 X1.4 X2.2 X2.4 | length 11.3
  Layer 1 w0.2: U3.35 1.424,16.579 2.129,17.284 2.525,17.284 3.025,17.783 3.025,17.875 C12.2 3.5,18.35 C12.2@3.5,18.406 ; U3.18 2.811,8.863 2.234,9.44 2.234,9.605 2.762,10.133 2.928,10.133 U3.20 ; C12.2@3.35,18.176 3.675,17.851 v1(4.34,17.851) ; C12.2@3.41,18.495 C12.2@3.5,18.406 ; v1(4.34,18.581) 3.675,18.581 C12.2@3.5,18.406
  Layer 1 w0.3: J1.13@-4.32,-19.22 -3.98,-18.88 -3.4,-18.88 -3.25,-18.73 J1.1 ; J1.12 3.25,-18.73 3.4,-18.88 3.98,-18.88 J1.13@4.32,-19.22
  other v1: -19.975,-19.875 -12.1,-19.475 -10.45,-18.175 5.321,-17.405 -5.624,-17.309 -10.675,-16.65 7.978,-16.358 10.439,-14.909 -10.698,-14.724 0,-14.2 3.435,-13.778 -4.402,-13.711 5.58,-13.275 -6.086,-13.051 7.503,-12.291 -18.9,-11.925 -9.218,-11.063 9.218,-11.063 14.535,-10.953 -15.088,-10.177 -10.182,-10.182 10.531,-9.821 -18.95,-8.85 16.1,-8.8 11.62,-8.505 -16.216,-8.263 -11.796,-8.26 12.2,-7.5 -13.051,-6.086 13.1,-5.5 -0.851,-4.826 0.851,-4.826 17.659,-4.403 -2.45,-4.244 2.45,-4.244 -13.909,-3.727 -3.625,-3.325 3.754,-3.15 14.2,-2.2 18.1,-1.9 4.604,-1.676 -14.345,-1.255 4.9,0 -14.354,1.155 4.604,1.676 19.7,3 3.754,3.15 -14.031,3.239 13.935,3.63 2.45,4.244 0.851,4.826 17.309,5.624 -13.196,5.765 12.9,6.3 16.627,7.403 11.796,8.26 19.575,9.825 15.264,9.912 10.182,10.182 -9.5,10.9 -14.535,10.953 8.052,11.938 -7.525,12.042 19.575,12.075 6.313,12.943 -1.055,14.361 0.703,14.383 -9.912,15.264 -8.263,16.216 5.725,17.4 -4.094,17.734 -4.975,18.425 -19.2,19.4 20.15,20.5
LED1: D2.2 U3.26 | length 5.9
  Layer 1 w0.2: U3.26 8.332,17.15 D2.2
LED2: D3.2 U3.25 | length 7.1
  Layer 1 w0.2: U3.25 8.289,16.4 9.585,16.4 D3.2
NetC8_1: C8.1 C9.1 FB1.2 U3.9 | length 8.6
  Layer 1 w0.2: FB1.2 -8.3,5.833 C8.1 C9.1 -4.397,5.835 U3.9
NetC15_1: C15.1 R4.1 R5.2 U2.4 | length 7.7
  Layer 1 w0.2: C15.1 10.727,4.523 R4.1@12.2,4.523 ; R4.1 12.441,4.309 15.659,4.309 ; U2.4 15.65,4.318 15.659,4.309 ; R5.2 16.959,4.309 15.659,4.309
NetC15_2: C15.2 R4.2 R15.2 U2.1 | length 5
  Layer 1 w0.2: C15.2 10.7,3.4 10.85,3.25 R4.2 12.2,2.548 ; R15.2 12.2,2.548 ; U2.1 12.202,2.55 12.2,2.548
NetC17_1: C17.1 U3.5 X1.1 | length 11.2
  Layer 1 w0.2: C17.1 -11.742,9.512 X1.1 -11.981,9.172 -11.081,8.272 -4.788,8.272 U3.5
NetC18_1: C18.1 U3.6 X1.3 | length 9.9
  Layer 1 w0.2: C18.1 -10.281,5.554 X1.3 -10.281,7.172 -9.581,7.872 -4.481,7.872 U3.6
NetC19_1: C19.1 U5.10 X2.3 | length 10.1
  Layer 1 w0.2: C19.1 C19.1@-7.85,-18.325 ; X2.3 -7.85,-16.8 C19.1@-7.85,-18.325 ; U5.10 -4.825,-12.925 -6.45,-14.55 -6.45,-17.55 -7.225,-18.325 C19.1@-7.85,-18.325
NetC20_1: C20.1 U5.9 X2.1 | length 8
  Layer 1 w0.2: X2.1 -9.15,-14.2 C20.1 -9.15,-12.525 -8.325,-11.7 -7,-11.7 -6.426,-12.274 U5.9
NetC27_1: C27.1 R15.1 TP1.1 U3.19 | length 15.3
  Layer 1 w0.2: U3.19 8.775,3.579 8.775,1.18 9.705,0.25 C27.1 ; TP1.1 C27.1 ; R15.1 C27.1
NetD1_1: D1.1 R1.1 | length 1.4
  Layer 1 w0.3: D1.1 -17.7,8.75 -17.7,7.45 R1.1
NetD2_1: D2.1 R2.1 | length 1.2
  Layer 1 w0.2: R2.1 D2.1
NetD3_1: D3.1 R3.1 | length 1.2
  Layer 1 w0.2: R3.1 D3.1
NetQ1_1: Q1.1 R16.2 U4.4 | length 11
  Layer 1 w0.2: U4.4 13.75,-3.3 13.9,-3.15 14.45,-3.15 15.3,-2.3 16.5,-2.3 Q1.1@18.75,-0.05 ; R16.2 18.6,3.062 18.588,3.05 18.35,3.05 18.25,2.95 18.25,2.371 17.7,1.821 17.7,1 Q1.1@18.75,-0.05 ; Q1.1 Q1.1@18.75,-0.05
NetR7_2: R7.2 U5.15 | length 4
  Layer 1 w0.2: U5.15 4.176,-10.326 5.049,-11.2 6.2,-11.2 6.9,-10.5 R7.2@6.9,-10.35
NetR8_2: R8.2 U5.16 | length 2.1
  Layer 1 w0.2: U5.16 4.676,-9.676 5.05,-10.05 5.2,-10.05 R8.2@5.5,-10.35
NetR9_2: R9.2 R11.1 U5.3 | length 6.5
  Layer 1 w0.2: R11.1 -8.368,-7.65 -8.068,-7.95 -8.068,-8 -7.692,-8.375 U5.3
NetR12_1: R12.1 U5.4 | length 7.1
  Layer 1 w0.2: R12.1 -5.65,-7.65 -5.7,-7.6 -5.4,-7.6 -4.693,-6.893 -4.3,-6.5 -3,-6.5 -2.5,-7 -2.5,-8.7 -2.826,-9.026 U5.4
NetTP4_1: TP4.1 U3.42 | length 7.3
  Layer 1 w0.2: TP4.1 -6.35,18.704 U3.42
NetTP5_1: TP5.1 U3.43 | length 8.6
  Layer 1 w0.2: TP5.1 -8.531,20.631 -8.531,20.149 -3.619,15.236 -3.59,15.236 U3.43
NRST: C16.1 TH2.1 U3.7 | length 14.7
  Layer 1 w0.2: U3.7 -2.763,8.836 -2.763,8.884 -0.231,11.415 -0.231,17.706 -0.975,18.45 -0.692,18.45 -0.542,18.6 -0.542,19.178 TH2.1
PERIOD: TP8.1 U3.38 | length 5.4
  Layer 1 w0.2: TP8.1@-3.81,21 TP8.1 -3.81,18.992 U3.38
SENSOR: C10.1 Q1.3 U2.3 U4.1 | length 6.2
  Layer 1 w0.3: U4.1 15.65,0.334 15.625,0.359 15.625,0.585 C10.1 ; U2.3 15.65,1.386 15.625,1.361 15.625,1.135 15.496,1.006 C10.1 ; v1(16.5,0.2) Q1.3 ; v1(16.5,1.6) Q1.3 ; C10.1 15.39,0.9 Q1.3
SPWM1: TP11.1 U3.12 | length 2
  Layer 1 w0.16: v2(-1.353,6) -1.423,6.069 -1.423,6.688 U3.12
  Layer 1 w0.2: TP11.1 -1.876,5.5 -1.377,6 v2(-1.353,6)
SPWM2: TP10.1 U3.11 | length 6.8
  Layer 1 w0.16: v1(-5.673,2.35) -5.673,2.481 -5.465,2.688 -5.465,3.055 -5.424,3.095 -5.424,3.394 U3.11
SPWM3: TP9.1 U3.10 | length 12.3
  Layer 1 w0.16: v1(-5.673,-2.35) -5.673,-1.627 -6.332,-0.968 -6.332,3.194 U3.10
SPWM4: TP16.1 U3.17 | length 24.5
  Layer 1 w0.16: v1(-2.35,-5.673) -1.727,-5.673 -1.068,-6.332 3.368,-6.332 7.4,-2.3 7.4,3.539 U3.17
SPWM5: TP15.1 U3.16 | length 18.2
  Layer 1 w0.16: U3.16 6.875,3.357 6.875,-2.079 3.282,-5.673 v1(2.35,-5.673)
SPWM6: TP14.1 U3.15 | length 12.3
  Layer 1 w0.16: U3.15 6.35,3.175 6.35,-1.321 6.139,-1.532 TP14.1 ; v1(5.673,-2.35) 6.102,-1.921 6.102,-1.62 TP14.1@6.137,-1.585
SPWM7: TP13.1 U3.14 | length 6.8
  Layer 1 w0.16: U3.14 5.424,3.394 5.424,3.095 5.465,3.055 5.465,2.967 5.638,2.794 5.638,2.384 v1(5.673,2.35)
SPWM8: TP12.1 U3.13 | length 2
  Layer 1 w0.16: U3.13 1.423,6.688 1.423,6.069 1.354,6 v2(1.353,6)
  Layer 1 w0.2: v2@1.354,6 1.376,6 1.876,5.5 TP12.1
SWCLK: TH5.1 U3.37 | length 4.9
  Layer 1 w0.2: TH5.1@-1.27,21 -2.175,20.095 -2.175,18.064 U3.37
SWDIO: TH4.1 U3.34 | length 11.9
  Layer 1 w0.2: U3.34 1.777,16.225 2.452,16.9 4.35,16.9 5.019,17.569 5.019,17.944 6.375,19.3 9.73,19.3 TH4.1@11.43,21
TIMEBASE: TP6.1 U3.33 | length 14
  Layer 1 w0.2: U3.33 2.131,15.871 2.743,16.484 5.834,16.484 7.825,18.475 11.445,18.475 TP6.1@13.97,21
UART1_RX: R11.2 U3.31 | length 29.4
  Layer 1 w0.16: R11.2 -9.768,-6.35 -9.018,-5.6 -5.4,-5.6 -4.698,-4.898 -4.698,-1.71 cw(c0,0) -0.919,4.915 ccw(c-1.343,5.914) -0.259,5.963 -0.259,8.591 1.731,10.581 1.731,14.094 2.801,15.164 U3.31
UART1_TX: R10.2 R12.2 U3.30 | length 26.8
  Layer 1 w0.16: R10.2 R12.2 -5.45,-6.35 -5.13,-6.03 -5.13,-5.98 -4.3,-5.15 -4.3,-1.658 ; -4.291,-1.658 cw(c0,0) -0.878,4.515 ccw(c-0.957,5.722) 0.25,5.801 0.25,8.35 2.186,10.286 2.186,13.832 U3.30
VUSB: C1.1 C2.1 J1.2 J1.11 U1.3 | length 39
  Layer 1 w0.2: C1.1 -18.375,-7.9 -16.8,-9.475 -14.831,-9.475 -11.375,-12.931 -11.375,-14.441 -11.377,-14.443 -11.377,-15.005 -11.375,-15.007 -11.375,-18.325 -10.1,-19.6 -6.775,-19.6 -4.275,-17.1 -2.917,-17.1 -2.65,-17.367 -2.65,-18.105 J1.2 -2.25,-18.505 -2.25,-19.287 -1.464,-20.073 1.464,-20.073 2.25,-19.287 2.25,-18.505 J1.11 ; C1.1@-18.375,-6.233 -18.375,-4.479 C2.1 -18.548,-2.7 -18.148,-2.3 U1.3
pads on no net: J1. J1.3 J1.9 U3.2 U3.3 U3.4 U3.21 U3.27 U3.28 U3.39 U3.40 U3.41 U3.45 U3.46 U5.1 U5.2 U5.11 U5.12 U5.13 U5.14 U5.17 U5.18 U5.20

## Polygon pours and split planes (outlines as drawn)
GND on Layer 2 "Bot GND Plane" (solid, remove dead copper, pour order 15): -21,-21 -21,21 21,21 21,-21 6,-21 6,-26 -6,-26 -6,-21
SENSOR on Layer 2 "Receiver" (solid, pour order 12): -17.5,0 ccw(c0,0) 0,-17.5 ccw(c0,0) 17.5,0 ccw(c0,0) 0,17.5 ccw(c0,0)
GND on Layer 2 "Guard outer" (solid, pour order 9): -15,0 ccw(c0,0) 0,-15 ccw(c0,0) 15,0 ccw(c0,0) 0,15 ccw(c0,0)
SPWM3 on Layer 2 "TX8" (solid, pour order 8): -9.546,-9.546 cw(c0,0) -13.5,0 0,0
SPWM4 on Layer 2 "TX7" (solid, pour order 7): 0,-13.5 cw(c0,0) -9.546,-9.546 0,0
SPWM5 on Layer 2 "TX6" (solid, pour order 6): 9.546,-9.546 cw(c0,0) 0,-13.5 0,0
SPWM6 on Layer 2 "TX5" (solid, pour order 5): 13.5,0 cw(c0,0) 9.546,-9.546 0,0
SPWM7 on Layer 2 "TX4" (solid, pour order 4): 9.546,9.546 cw(c0,0) 13.5,0 0,0
SPWM8 on Layer 2 "TX3" (solid, pour order 3): 0,13.5 cw(c0,0) 9.546,9.546 0,0
SPWM1 on Layer 2 "TX2" (solid, pour order 2): -9.546,9.546 cw(c0,0) 0,13.5 0,0
SPWM2 on Layer 2 "TX1" (solid, pour order 1): -13.5,0 cw(c0,0) -9.546,9.546 0,0
GND on Layer 2 "Guard inner" (solid, pour order 0): -5.5,0 ccw(c0,0) 0,-5.5 ccw(c0,0) 5.5,0 ccw(c0,0) 0,5.5 ccw(c0,0)
GND on Layer 1 "Top GND Plane" (solid, remove dead copper, pour order 16): -21,-21 -21,21 21,21 21,-21 6,-21 6,-26 -6,-26 -6,-21
no net on Bottom Courtyard "Reflector_Outer" (solid, pour order 11): -17.5,0 ccw(c0,0) 17.5,0 ccw(c0,0)
no net on Bottom Courtyard "Reflector_Inner" (solid, pour order 10): -15,0 ccw(c0,0) 15,0

## Keep-outs
Layer 1:
  circle w0.05: c18,8.5 r0.5
  circle w0.05: c-19.5,18 r0.5
  circle w0.05: c9,-18.5 r0.5

## Other copper
Layer 1:
  pour cut-out: 15.5,-19.5 cw(c15.5,-15.5) 11.5,-15.5 cw(c15.5,-15.5) 15.5,-11.5 cw(c15.5,-15.5) 19.5,-15.5 cw(c15.5,-15.5)
  pour cut-out: -15.5,-19.5 cw(c-15.5,-15.5) -19.5,-15.5 cw(c-15.5,-15.5) -15.5,-11.5 cw(c-15.5,-15.5) -11.5,-15.5 cw(c-15.5,-15.5)
  pour cut-out: 15.5,11.5 cw(c15.5,15.5) 11.5,15.5 cw(c15.5,15.5) 15.5,19.5 cw(c15.5,15.5) 19.5,15.5 cw(c15.5,15.5)
  pour cut-out: -15.5,11.5 cw(c-15.5,15.5) -19.5,15.5 cw(c-15.5,15.5) -15.5,19.5 cw(c-15.5,15.5) -11.5,15.5 cw(c-15.5,15.5)
  pour cut-out: 0,-4.263 cw(c0,0) -4.263,0 cw(c0,0) 0,4.263 cw(c0,0) 4.263,0 cw(c0,0)
Layer 2:
  pour cut-out: 15.5,11.5 cw(c15.5,15.5) 11.5,15.5 cw(c15.5,15.5) 15.5,19.5 cw(c15.5,15.5) 19.5,15.5 cw(c15.5,15.5)
  pour cut-out: 15.5,-19.5 cw(c15.5,-15.5) 11.5,-15.5 cw(c15.5,-15.5) 15.5,-11.5 cw(c15.5,-15.5) 19.5,-15.5 cw(c15.5,-15.5)
  pour cut-out: -15.5,-19.5 cw(c-15.5,-15.5) -19.5,-15.5 cw(c-15.5,-15.5) -15.5,-11.5 cw(c-15.5,-15.5) -11.5,-15.5 cw(c-15.5,-15.5)
  pour cut-out: -15.5,11.5 cw(c-15.5,15.5) -19.5,15.5 cw(c-15.5,15.5) -15.5,19.5 cw(c-15.5,15.5) -11.5,15.5 cw(c-15.5,15.5)
  pour cut-out: 0,-4.263 cw(c0,0) -4.263,0 cw(c0,0) 0,4.263 cw(c0,0) 4.263,0 cw(c0,0)

## Silkscreen, mask and mechanical layers (free items; w line width, h text height)
Top Overlay:
  circle w0.2: c0,0 r1.5
  circle w0.2: c0,0 r2.5
  lines w0.2: -20.5,21 -18,21 ; 18,21 20.5,21
  text "RX1" at -8.39,22.564 h1 r90
  text "TX1" at -5.85,22.564 h1 r90
  text "DIO" at 11.93,22.48 h1 r90
  text "TIM" at 14.47,22.48 h1 r90
  text "GND" at -16.01,22.397 h1 r90
  text "GND" at -13.47,22.397 h1 r90
  text "BT0" at -10.93,22.397 h1 r90
  text "PER" at -3.31,22.397 h1 r90
  text "CLK" at -0.77,22.397 h1 r90
  text "RST" at 1.77,22.397 h1 r90
  text "3V3" at 4.31,22.397 h1 r90
  text "GND" at 6.85,22.397 h1 r90
  text "GND" at 9.39,22.397 h1 r90
  text "GND" at 17.01,22.397 h1 r90
  text "'.ProjectNumber''.Revision'" at -20.432,-20.5 h1
Top Assembly Drawing:
  circle w0.25: c18,8.5 r0.125
  circle w0.1: c18,8.5 r0.5
  circle w0.25: c-19.5,18 r0.125
  circle w0.1: c-19.5,18 r0.5
  circle w0.1: c9,-18.5 r0.5
  circle w0.25: c9,-18.5 r0.125
Board Outline:
  the board outline again, w0.2
Reflector:
  pour cut-out: -4,0 ccw(c0,0) 0,-4 ccw(c0,0) 4,0 ccw(c0,0) 0,4 ccw(c0,0)